# Altium PCB PCB.PcbDoc (part 2 of 2)
Units mm, origin at the board's own origin, x right, y up, seen from the top; angles counter-clockwise.
Board outline 81.5 x 81.5 mm, 2 copper layers (Top Layer, Bottom Layer), stack 1.571 mm thick; 125 components, 80 nets, 407 pads, 356 vias.
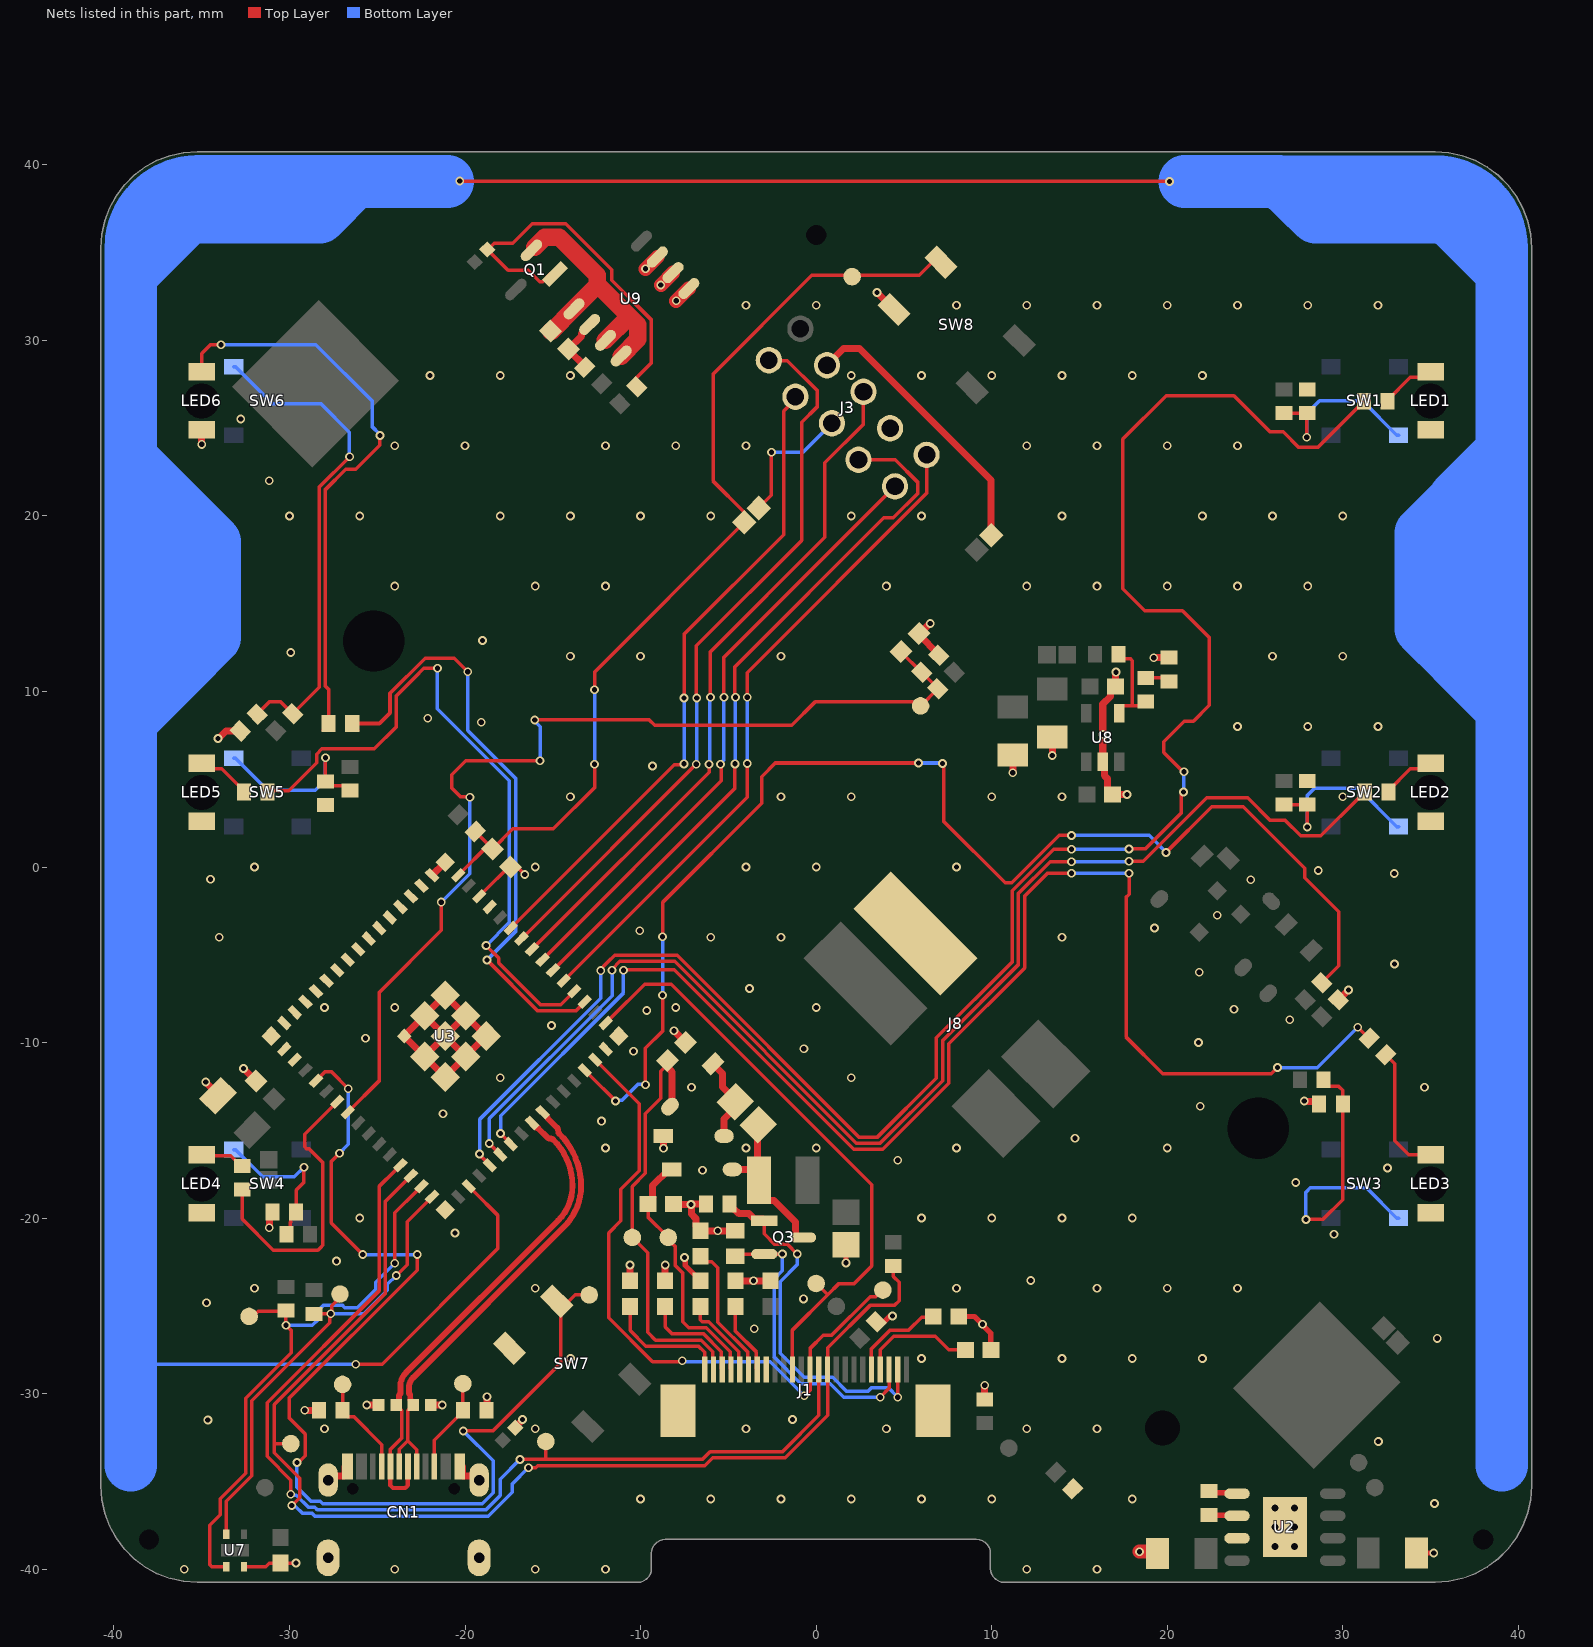
[diagram p2: the nets of this part, all layers, seen from the top]

## Via types
v1: diameter 0.5, hole 0.3, Top Layer to Bottom Layer, tented both sides, 350 vias
v2: diameter 0.6, hole 0.4, Top Layer to Bottom Layer, tented both sides, 6 vias

## Nets (pads, with @x,y where several pads share a name; then routed paths per layer and width w, separated by ;. In a path a pad name is that pad's centre, name@x,y a point inside that pad or via, vN(x,y) a via of type N, cw(c..) or ccw(c..) an arc to the next point about the centre after c; other vN are vias at no path point) (continued)
DISP_CS: J1.12 TP13.1 U3.29 | length 37.2
  Top Layer w0.2: U3.29@-12.298,-11.255 -10.075,-13.478 -10.075,-17.305 -11.124,-18.354 -11.124,-20.149 -11.825,-20.85 -11.825,-25.67 -9.32,-28.175 -7.675,-28.175 v1(-7.625,-28.125) ; v1(-0.675,-30.125) -0.35,-29.8 J1.12@-0.35,-28.619 -0.35,-27.425 0.4,-26.675 0.875,-26.675 3.075,-24.475 3.4,-24.475 TP13.1@3.625,-24.25
  Bottom Layer w0.2: v1(-7.625,-28.125) -7.575,-28.175 -2.625,-28.175 v1(-0.675,-30.125)
DISP_D/C: J1.11 TP16.1 U3.12 | length 58.9
  Top Layer w0.2: v1(-29.925,-35.725) -29.925,-34.925 -31.275,-33.575 -31.275,-30.525 -24.9,-24.15 -24.9,-18.2 U3.12@-23.965,-17.265 ; v1(-16.875,-33.75) -16.85,-33.725 -15.425,-33.725 ; TP16.1@-15.4,-32.725 -15.4,-33.7 -15.425,-33.725 ; J1.11@0.15,-28.619 0.15,-31.235 -1.915,-33.3 -6.045,-33.3 -6.47,-33.725 -15.425,-33.725
  Bottom Layer w0.2: v1(-29.925,-35.725) -29.868,-35.782 -29.613,-35.782 -28.921,-36.475 -28.553,-36.475 -28.403,-36.625 -18.825,-36.625 -18,-35.8 -18,-34.875 v1(-16.875,-33.75)
DISP_GDR: J1.2 Q3.1 R19.2 | length 21.3
  Top Layer w0.2: Q3.1@-2.95,-20.15 -2.95,-20.9 -2.35,-21.5 -1.625,-21.5 v1(-1.075,-22.05) ; v1(4.65,-30.2) J1.2@4.65,-28.619
  Top Layer w0.4: R19.2@-4.925,-19.2 -4.925,-19.275 -4.725,-19.475 -4.675,-19.475 -4.4,-19.75 -3.817,-19.75 -3.503,-20.064 -3.037,-20.064 Q3.1@-2.95,-20.15 -3.114,-20.15 Q3.1@-3.2,-20.236
  Bottom Layer w0.2: v1(-1.075,-22.05) -1.075,-22.645 -2.05,-23.62 -2.05,-27.7 -0.675,-29.075 0.945,-29.075 1.72,-29.85 2.975,-29.85 3.175,-29.65 4.1,-29.65 v1(4.65,-30.2)
DISP_PREVGH: C10.1 D3.1 J1.21 TP12.1 | length 15.1
  Top Layer w0.2: C10.1@-9.198,-18.844 -9.554,-19.2 -9.568,-19.2 C10.1@-9.577,-19.2 -9.577,-19.948 TP12.1@-8.425,-21.1 -8.425,-21.217 -8.025,-21.617 -8.025,-22.7 -7.6,-23.125 -7.6,-25.9 -7.25,-26.25 -6.265,-26.25 -4.9,-27.615 -4.9,-28.569 J1.21@-4.85,-28.619 ; D3.1@-8.393,-17.225 D3.1@-8.23,-17.225
  Top Layer w0.4: C10.1@-9.568,-19.2 -9.312,-18.944 -9.312,-18.144 D3.1@-8.393,-17.225
DISP_PREVGL: C12.1 D1.2 J1.23 TP11.1 | length 24.7
  Top Layer w0.2: C12.1@-8.464,-11.014 -8.464,-11.245 -8.48,-11.261 -8.85,-11.631 -8.85,-13.175 -9.725,-14.05 -9.725,-17.45 -10.475,-18.2 TP11.1@-10.475,-21.1 -9.6,-21.975 -9.6,-26.5 -9.15,-26.95 -6.555,-26.95 -5.9,-27.605 -5.9,-28.569 J1.23@-5.85,-28.619
  Top Layer w0.4: C12.1@-8.464,-11.014 -8.48,-11.03 -8.48,-11.261 -8.48,-11.392 -8.208,-11.665 -8.208,-13.533 D1.2@-8.323,-13.648
DISP_RESE: J1.3 Q3.2 R3.1 | length 17.6
  Top Layer w0.2: R3.1@-4.6,-22.175 -4.475,-22.05 Q3.2@-2.95,-22.05 ; Q3.2@-2.9,-22.1 Q3.2@-2.95,-22.05 ; v1(-1.925,-22.05) Q3.2@-2.95,-22.05 ; v1(3.65,-30.2) 4.15,-29.7 J1.3@4.15,-28.619
  Bottom Layer w0.2: v1(-1.925,-22.05) -1.925,-23 -2.4,-23.475 -2.4,-27.905 -0.88,-29.425 0.8,-29.425 1.575,-30.2 v1(3.65,-30.2)
DISP_RST: J1.10 R20.2 TP18.1 U3.13 | length 68
  Top Layer w0.2: v1@-29.932,-36.318 v1(-29.875,-36.375) -29.868,-36.375 -29.425,-35.932 -29.425,-34.82 -30.875,-33.37 -30.875,-32.825 ; TP18.1@-29.925,-32.85 -30.85,-32.85 -30.875,-32.825 ; U3.13@-23.364,-17.866 -24.55,-19.052 -24.55,-24.295 -30.875,-30.62 -30.875,-32.825 ; v1(-16.391,-34.225) -15.975,-34.225 -15.85,-34.1 -6.35,-34.1 -5.9,-33.65 -1.77,-33.65 0.65,-31.23 J1.10@0.65,-28.619 0.65,-27.395 3.07,-24.975 4.45,-24.975 4.725,-24.7 4.725,-23.65 4.4,-23.325 R20.2@4.4,-22.725
  Bottom Layer w0.2: v1(-29.875,-36.375) -29.818,-36.432 -29.645,-36.432 -29.253,-36.825 -28.698,-36.825 -28.548,-36.975 -18.68,-36.975 -17.311,-35.606 -17.311,-35.146 v1(-16.391,-34.225)
DISP_SDI: J1.14 TP15.1 U3.31 | length 34.2
  Top Layer w0.2: U3.31@-11.697,-8.603 -9.769,-6.675 -8.25,-6.675 3.175,-18.1 3.175,-22.725 2.175,-23.725 1.3,-23.725 0.663,-24.363 ; J1.14@-1.35,-28.619 -1.35,-26.375 0.663,-24.363 ; TP15.1@0,-23.725 0.025,-23.725 0.663,-24.363
ESP_DBG_RX: J3.7 U3.40 | length 36.9
  Top Layer w0.2: U3.40@-17.106,-3.194 -8.087,5.825 -7.575,5.825 v1(-7.525,5.875) v1@-7.475,5.875 ; v1(-7.525,9.625) -7.525,13.25 -1.85,18.925 -1.85,25.974 -1.179,26.645 J3.7@-1.179,26.788
  Bottom Layer w0.2: v1(-7.525,5.875) v1(-7.525,9.625)
ESP_DBG_TX: J3.6 U3.39 | length 41.3
  Top Layer w0.2: U3.39@-16.505,-3.795 -16.488,-3.795 -6.843,5.85 v1(-6.825,5.85) ; v1(-6.8,9.625) -6.825,9.65 -6.825,12.6 -0.825,18.6 -0.825,25.325 0.05,26.2 0.05,27.15 -1.642,28.842 -2.667,28.842 J3.6@-2.692,28.867
  Bottom Layer w0.2: v1(-6.825,5.85) -6.812,5.863 -6.812,9.613 v1(-6.8,9.625)
ESP_EN: C16.1 J7.1 R21.1 SW8.2 TP3.1 U3.45 | length 54.3
  Top Layer w0.2: U3.45@-20.111,-0.189 -18.895,1.028 C16.1@-18.428,1.028 ; R21.1@-19.423,2.023 C16.1@-18.428,1.028 ; v1(-12.625,5.85) -12.625,4.525 -14.975,2.175 -17.281,2.175 C16.1@-18.428,1.028 ; v1(-12.625,10.1) -12.625,11.1 J7.1@-4.088,19.637 -4.088,20.203 -5.875,21.989 -5.875,28.075 -0.25,33.7 5.875,33.7 6.621,34.446 SW8.2@7.116,34.446
  Bottom Layer w0.2: v1(-12.625,5.85) v1(-12.625,10.1)
ESP_IO0: SW7.2 TP19.1 U3.4 | length 61.9
  Top Layer w0.2: v1(-29.575,-33.925) -29.494,-33.925 -29.1,-33.531 -29.1,-32.3 -30.025,-31.375 -30.025,-30.265 -22.725,-22.965 v1(-22.725,-22.075) ; U3.4@-28.491,-12.174 -27.967,-11.65 -27.625,-11.65 v1(-26.65,-12.625) ; v1(-27.15,-16.3) -27.625,-16.775 -27.625,-20.275 v1(-25.825,-22.075) ; v1(-20.1,-32.125) -18.425,-32.125 -14.536,-28.236 -14.536,-24.977 SW7.2@-14.714,-24.799 ; SW7.2@-14.784,-24.729 SW7.2@-14.714,-24.799 ; TP19.1@-12.925,-24.375 -13.725,-24.375 -14.149,-24.799 SW7.2@-14.714,-24.799
  Bottom Layer w0.2: v1(-29.575,-33.925) -29.575,-35.326 -28.776,-36.125 -28.25,-36.125 -28.1,-36.275 -19.024,-36.275 -18.4,-35.651 -18.4,-33.825 v1(-20.1,-32.125) ; v1(-27.15,-16.3) -26.65,-15.8 v1(-26.65,-12.625) ; v1(-25.825,-22.075) v1(-22.725,-22.075)
ESP_SCL: R17.1 TP9.1 U3.15 U7.2 | length 27.1
  Top Layer w0.2: U7.2@-33.6,-38 -33.6,-36.125 -32.15,-34.675 -32.15,-30.41 -27.707,-25.967 -27.707,-25.507 v1(-27.65,-25.45) R17.1@-28.6,-25.45 ; v1(-27.65,-25.45) -27.593,-25.393 -27.593,-24.989 -27.125,-24.521 TP9.1@-27.125,-24.325 ; v1(-23.925,-23.275) -23.3,-22.65 -23.3,-20.206 U3.15@-22.162,-19.068
  Bottom Layer w0.2: v1(-27.65,-25.45) -25.775,-25.45 -24.424,-24.099 -24.424,-23.774 v1(-23.925,-23.275)
ESP_SDA: R18.1 TP10.1 U3.14 U7.3 | length 32.7
  Top Layer w0.2: U7.3@-33.6,-39.85 -34.433,-39.85 -34.55,-39.733 -34.55,-37.5 -33.95,-36.9 -33.95,-35.98 -32.5,-34.53 -32.5,-30.265 -29.9,-27.665 -29.9,-26.4 v1(-30.2,-26.1) R18.1@-30.2,-25.5 ; TP10.1@-32.3,-25.6 -32.084,-25.6 -31.784,-25.3 -30.4,-25.3 R18.1@-30.2,-25.5 ; R18.1@-30.2,-25.275 R18.1@-30.2,-25.5 ; v1(-24,-22.575) -24,-19.704 U3.14@-22.763,-18.467
  Bottom Layer w0.2: v1(-30.2,-26.1) -28.7,-26.1 -28.375,-25.775 -28.375,-25.275 -28.05,-24.95 -27,-24.95 -26.85,-25.1 -26.132,-25.1 -25.082,-24.05 -25.082,-23.657 v1(-24,-22.575)
ESP_TCK: J3.1 U3.35 | length 38.1
  Top Layer w0.2: -14.101,-6.199 -3.925,3.977 v1(-3.925,5.9) ; v1(-3.925,9.675) -3.925,11.075 6.288,21.288 J3.1@6.288,23.479
  Bottom Layer w0.2: v1(-3.925,5.9) v1(-3.925,9.675)
ESP_TDI: J3.10 U3.37 | length 34.9
  Top Layer w0.2: U3.37@-15.303,-4.997 -5.4,4.906 -5.4,5.8 v1(-5.45,5.85) ; v1(-5.25,9.675) -5.25,11.941 J3.10@4.492,21.683
  Bottom Layer w0.2: v1(-5.45,5.85) -5.45,5.917 -5.25,6.117 v1(-5.25,9.675)
ESP_TDO: J3.9 U3.36 | length 40.2
  Top Layer w0.2: U3.36@-14.702,-5.598 -4.625,4.479 v1(-4.625,5.875) ; v1(-4.6,9.675) -4.625,9.7 -4.625,11.4 3.86,19.885 4.39,19.885 5.775,21.27 5.775,21.933 4.512,23.196 J3.9@2.413,23.196
  Bottom Layer w0.2: v1(-4.625,5.875) -4.613,5.887 -4.613,9.663 v1(-4.6,9.675)
ESP_TMS: J3.3 U3.38 | length 39.2
  Top Layer w0.2: U3.38@-15.904,-4.396 -6.1,5.408 v1(-6.1,5.85) ; v1(-6.025,9.675) -6.025,12.25 0.5,18.775 0.5,23.025 2.696,25.221 J3.3@2.696,27.071
  Bottom Layer w0.2: v1(-6.1,5.85) -6.062,5.888 -6.062,9.638 v1(-6.025,9.675)
GND: C2.2 C3.2 C4.2 C5.2 C6.2 C7.2 C8.2 C9.2 C10.2 C11.2 C12.2 C13.2 C14.2 C15.2 C16.2 C17.2 C18.2 C19.2 C26.2 C27.2 C28.2 C29.2 CN1.A1 CN1.A12 CN1.B1 CN1.B12 CN1.SHELL1 CN1.SHELL2 CN1.SHELL3 CN1.SHELL4 D2.1 D4.1 D5.1 D6.1 J1.17 J1.MP1 J1.MP2 J3.2 J8.1 LED1.2 LED2.2 LED3.2 LED4.2 LED5.2 LED6.2 R1.1 R2.1 R3.2 R4.1 R5.1 R8.1 R10.1 R12.1 R13.1 R14.1 R19.1 R34.1 R35.1 R36.1 R37.1 R38.1 R39.1 SW7.4 SW8.4 U2.1 U2.3 U2.9 U3.1 U3.2 U3.30 U3.42 U3.43 U3.46 U3.47 U3.48 U3.49 U3.50 U3.51 U3.52 U3.53 U3.54 U3.55 U3.56 U3.57 U3.58 U3.59 U3.60 U3.61 U3.61_1 U3.61_2 U3.61_3 U3.61_4 U3.61_5 U3.61_6 U3.61_7 U3.61_8 U3.62 U3.63 U3.64 U3.65 U7.4 U8.2 U9.1 U9.2 U9.3 | length 81.6
  Top Layer w0.2: U7.4@-32.6,-39.85 -31.35,-39.85 -31.152,-39.652 C27.2@-30.5,-39.652 v1(-29.627,-39.652) v1@-29.625,-39.65 ; U3.43@-18.909,-1.391 -17.519,0 C16.2@-17.4,0 -17.025,0 v1(-16.6,-0.425)
  Top Layer w0.3: v1(-7.5,-22.25) -7.462,-22.288 -7.462,-22.688 -6.6,-23.55 C9.2@-6.6,-23.573 ; v1(1.7,-22.55) C2.2@1.7,-21.526 ; R4.1@3.427,-25.898 3.48,-25.951 3.834,-25.951 4.21,-25.575 v1(4.35,-25.575) ; C5.2@8.127,-25.6 9.025,-25.6 v1(9.475,-26.05) 9.475,-26.086 9.952,-26.563 C4.2@9.952,-27.5 ; R5.1@22.375,-35.55 22.463,-35.638 23.918,-35.638 U2.1@23.975,-35.695 ; C15.2@34.201,-39.075 v1(35.175,-39.075)
  Top Layer w0.4: v1(-35,24.075) LED6.2@-35,24.9 ; v1(-34.775,-12.25) -34.073,-12.952 C17.2@-34.073,-13.027 ; v1(-34.075,7.325) -34.048,7.325 -33.625,7.748 -33.191,7.748 -33.138,7.801 -32.855,7.801 R39.1@-32.802,7.748 ; v1(-32.625,-11.475) C18.2@-31.914,-12.186 ; v1(-31.15,-20.55) -31.131,-20.531 -31.131,-19.806 R37.1@-30.975,-19.65 ; v1(-29.125,-30.95) R2.1@-28.325,-30.95 ; CN1.SHELL1@-27.8,-34.92 -27.58,-34.7 -26.89,-34.7 -26.85,-34.66 CN1.A1@-26.85,-34.15 ; v1@-25.625,-30.675 v1(-25.6,-30.65) D4.1@-24.929,-30.65 ; D5.1@-21.946,-30.65 v1(-21.3,-30.65) ; U3.46@-21.879,-0.471 -21.207,0.2 U3.65@-21.066,0.2 ; CN1.A12@-20.15,-34.15 -20.15,-34.66 -20.11,-34.7 -19.42,-34.7 CN1.SHELL2@-19.2,-34.92 ; R1.1@-18.775,-30.95 -18.762,-30.937 -18.762,-30.187 v1(-18.75,-30.175) ; D6.1@-17.144,-31.944 -17.144,-31.919 -16.725,-31.5 v1(-16.725,-31.475) ; C13.2@-10.6,-23.573 v1(-10.6,-22.675) ; D2.1@-8.705,-15.325 -8.7,-15.33 v1(-8.7,-16.025) ; C11.2@-8.6,-23.573 v1(-8.6,-22.675) ; C10.2@-8.123,-19.2 -8.111,-19.212 -7.138,-19.212 v1(-7.125,-19.225) ; v1(-8.097,-9.325) C12.2@-7.436,-9.986 ; R19.1@-6.275,-19.2 -7.1,-19.2 v1(-7.125,-19.225) ; C7.2@-4.6,-23.573 v1(-3.573,-23.573) C6.2@-2.6,-23.573 ; R3.2@-4.6,-20.725 v1(-5.6,-20.725) v1(-5.6,-20.725) C8.2@-6.6,-20.723 -6.856,-20.467 -6.856,-20.019 -7.106,-19.769 -7.106,-19.244 v1(-7.125,-19.225) ; v1(3.463,32.725) SW8.4@4.429,31.759 ; v1(6.5,13.875) 6.473,13.875 5.898,13.3 C26.2@5.85,13.3 5.85,13.237 6.975,12.112 R14.1@6.975,12.05 ; R12.1@9.6,-30.325 v1(9.6,-29.525) ; v1(11.2,5.375) C19.2@11.2,6.374 ; C29.2@13.45,7.399 v1(13.45,6.35) v1@13.475,6.325 ; v1(17.076,11.101) 17.063,11.088 17.063,10.288 C28.2@17.05,10.275 17.027,10.275 16.771,10.019 16.771,9.721 16.325,9.275 v1(16.325,7.55) U8.2@16.325,6 16.425,5.9 16.425,5.2 16.598,5.027 16.598,4.381 16.854,4.125 C3.2@16.877,4.125 v1(17.7,4.125) ; v1(19.225,11.925) R8.1@20.1,11.925 ; v1(27.8,-13.325) 27.819,-13.344 28.494,-13.344 R36.1@28.65,-13.5 ; R10.1@29.752,-7.573 v1(30.325,-7) ; U3.61_1@-22.303,-10.795 U3.61_2@-21.137,-11.962 U3.61_3@-19.97,-10.795 ; U3.61_1@-22.303,-10.795 U3.61_8@-23.47,-9.628 U3.61_7@-22.303,-8.462 ; U3.61_1@-22.303,-10.795 U3.61@-21.137,-9.628 ; U3.61_7@-22.303,-8.462 U3.61@-21.137,-9.628 ; U3.61_7@-22.303,-8.462 U3.61_6@-21.137,-7.295 U3.61_5@-19.97,-8.462 ; U3.61@-21.137,-9.628 U3.61_3@-19.97,-10.795 ; U3.61@-21.137,-9.628 U3.61_5@-19.97,-8.462 ; U3.61_3@-19.97,-10.795 U3.61_4@-18.803,-9.628 U3.61_5@-19.97,-8.462
  Top Layer w0.8: v1(-9.725,34.075) U9.3@-9.046,34.754 ; v1(-8.85,33.15) -8.148,33.852 U9.2@-8.148,33.856 ; v1(-7.975,32.25) -7.267,32.958 U9.1@-7.25,32.958 ; v1(18.425,-39) 19.347,-39 C14.2@19.447,-39.1
  other v1: -36,-40 -24,-40 -16,-40 -12,-40 12,-40 16,-40 35.225,-36.25 -10,-36 -6,-36 -2,-36 2,-36 6,-36 10,-36 18,-36 32.025,-32.725 -28,-32 -16,-32 -4,-32 4,-32 12,-32 16,-32 -34.65,-31.5 -1.35,-31.475 -14,-28 6,-28 14,-28 18,-28 22,-28 35.375,-26.85 -3.525,-26.3 -34.725,-24.825 -0.725,-24.6 -32,-24 -16,-24 8,-24 16,-24 20,-24 24,-24 12.225,-23.55 -27.325,-22.45 29.5,-20.925 -20.575,-20.85 -26,-20 6,-20 10,-20 14,-20 18,-20 27.325,-17.975 -6.475,-17.275 32.55,-17.15 4.65,-16.7 -12,-16 -4,-16 0,-16 8,-16 20,-16 14.75,-15.45 -12.225,-14.475 -21.25,-14.05 21.875,-13.625 -7.1,-12.55 34.65,-12.55 -18,-12 2,-12 -10.4,-10.5 -0.7,-10.35 21.775,-10 -25.675,-9.75 -15.075,-9.025 26.975,-8.7 -9.65,-8.175 23.8,-8.1 -28,-8 -24,-8 -8,-8 0,-8 -3.8,-6.925 21.825,-6 32.95,-5.525 -34,-4 -6,-4 -2,-4 14,-4 -10.05,-3.625 19.275,-3.475 22.85,-2.75 24.75,-0.725 -34.5,-0.7 32.925,-0.375 28.6,-0.2 -32,0 -16,0 -4,0 0,0 8,0 -14,4 -2,4 2,4 10,4 14,4 30,4 -9.325,5.75 24,8 28,8 32,8 -19.075,8.25 -22.125,8.475 -14,12 -10,12 -2,12 26,12 30,12 -29.926,12.226 -19,12.9 -24,16 -16,16 -12,16 4,16 12,16 16,16 20,16 24,16 28,16 -30,20 -26,20 -18,20 -14,20 -10,20 -6,20 2,20 6,20 14,20 22,20 26,20 30,20 -31.15,22 -24,24 -20,24 -12,24 -8,24 -4,24 12,24 16,24 20,24 24,24 -32.775,25.525 -22,28 -18,28 -14,28 2,28 6,28 10,28 14,28 18,28 22,28 -4,32 0,32 8,32 12,32 16,32 20,32 24,32 28,32 32,32
  other v2: 26.15,-38.7 27.25,-38.7 26.15,-37.6 27.25,-37.6 26.15,-36.5 27.25,-36.5
LED_1: R23.1 U3.19 | length 107
  Top Layer w0.2: v1(-19.175,-16.35) -19.175,-16.399 U3.19@-18.591,-16.982 ; v1(-12.274,-5.902) -12.274,-5.821 -12.125,-5.671 -12.125,-5.668 -11.832,-5.375 -11.829,-5.375 -11.479,-5.025 -7.92,-5.025 2.435,-15.38 3.495,-15.38 6.851,-12.024 6.851,-9.736 11.175,-5.411 11.175,-1.36 13.542,1.007 v1(14.543,1.007) ; v1(17.821,1.029) 18.754,1.029 20.808,3.083 20.808,4.076 20.925,4.194 v1(20.925,4.275) ; v1(20.95,5.425) 20.9,5.425 19.8,6.525 19.8,7.132 20.968,8.3 21.492,8.3 22.4,9.208 22.4,13.075 20.975,14.5 20.965,14.5 20.865,14.6 18.718,14.6 17.475,15.843 17.475,24.38 19.945,26.85 23.8,26.85 25.85,24.8 26.6,24.8 27.5,23.9 28.575,23.9 30.825,26.15 30.9,26.15 31.2,26.45 R23.1@31.2,26.525
  Bottom Layer w0.2: v1(-19.175,-16.35) -19.175,-14.385 -12.274,-7.484 v1(-12.274,-5.902) ; v1(14.543,1.007) 14.554,1.018 17.811,1.018 v1(17.821,1.029) ; v1(20.925,4.275) 20.937,4.287 20.937,5.413 v1(20.95,5.425)
LED_2: R25.1 U3.20 | length 74.9
  Top Layer w0.2: v1(-18.621,-15.75) U3.20@-17.99,-16.381 ; v1(-11.625,-5.875) -11.625,-5.818 -11.182,-5.375 -8.065,-5.375 2.29,-15.73 3.64,-15.73 7.201,-12.169 7.201,-9.881 11.525,-5.556 11.525,-1.505 13.33,0.3 v1(14.55,0.3) ; v1(17.825,0.325) 18.625,0.325 22.25,3.95 24.575,3.95 25.875,2.65 26.725,2.65 27.6,1.775 28.75,1.775 30.875,3.9 30.95,3.9 31.25,4.2 R25.1@31.25,4.275
  Bottom Layer w0.2: v1(-18.621,-15.75) -18.621,-14.326 -11.625,-7.33 v1(-11.625,-5.875) ; v1(14.55,0.3) 14.563,0.312 17.812,0.312 v1(17.825,0.325)
LED_3: R27.1 U3.21 | length 82.1
  Top Layer w0.2: v1(-17.975,-15.175) -17.975,-15.194 U3.21@-17.185,-15.985 ; v1(-10.975,-5.875) -10.95,-5.85 -8.085,-5.85 2.145,-16.08 3.785,-16.08 7.551,-12.314 7.551,-10.074 11.875,-5.75 11.875,-1.65 13.175,-0.35 v1(14.55,-0.35) ; v1(17.825,-0.35) 17.825,-1.55 17.65,-1.725 17.65,-9.68 19.745,-11.775 25.925,-11.775 v1(26.275,-11.425) ; v1(30.85,-9.125) 31.473,-9.748 R27.1@31.498,-9.748
  Bottom Layer w0.2: v1(-17.975,-15.175) -17.975,-14.175 -10.975,-7.175 v1(-10.975,-5.875) ; v1(14.55,-0.35) v1(17.825,-0.35) ; v1(26.275,-11.425) 28.55,-11.425 v1(30.85,-9.125)
LED_4: R29.1 U3.6 | length 16.2
  Top Layer w0.2: R29.1@-32.7,-18.375 -32.7,-20.05 -30.925,-21.825 -28.379,-21.825 -28.229,-21.675 -28.225,-21.675 -28.1,-21.55 -28.1,-16.83 -28.868,-16.063 -29.008,-16.063 -29.125,-15.945 -29.125,-15.213 U3.6@-27.571,-13.659
LED_5: R31.1 U3.34 | length 38.9
  Top Layer w0.2: R31.1@-31.25,4.275 -31.175,4.35 -30.05,4.35 -28.451,5.949 -28.451,6.432 -28.155,6.729 -25.171,6.729 -23.925,7.975 -23.925,9.743 -22.843,10.825 -22.343,11.325 v1(-21.575,11.325) ; v1(-18.8,-4.475) -18.09,-5.185 -18.09,-5.465 -15.705,-7.85 -14.55,-7.85 U3.34@-13.783,-7.083
  Bottom Layer w0.2: v1(-21.575,11.325) -21.575,9.007 -17.475,4.907 -17.475,-3.15 v1(-18.8,-4.475)
LED_6: R33.1 U3.33 | length 34.8
  Top Layer w0.2: R33.1@-26.125,7.8 -26.425,8.1 R33.1@-26.425,8.175 -24.875,8.175 -24.275,8.775 -24.275,9.888 -22.263,11.9 -20.625,11.9 v1(-19.85,11.125) ; v1(-18.75,-5.3) -15.85,-8.2 -13.698,-8.2 U3.33@-13.182,-7.684
  Bottom Layer w0.2: v1(-19.85,11.125) -19.85,7.777 -17.125,5.052 -17.125,-3.675 v1(-18.75,-5.3)
NetC1_1: C1.1 D1.1 D2.2 | length 4.9
  Top Layer w0.4: D1.1@-5.877,-11.202 -5.325,-11.753 -5.325,-12.525 -4.605,-13.245 C1.1@-4.605,-13.37 -4.605,-13.707 -5.245,-14.348 D2.2@-5.245,-15.325
NetC1_2: C1.2 D3.2 L1.2 Q3.3 | length 9.6
  Top Layer w0.2: L1.2@-3.828,-17.225 L1.2@-3.331,-17.722
  Top Layer w0.4: D3.2@-4.77,-17.225 L1.2@-3.828,-17.225 ; C1.2@-3.295,-14.68 -3.331,-14.716 -3.331,-17.722 -3.331,-17.769 L1.2@-3.251,-17.85 -3.251,-18.526 -2.773,-19.003 -2.397,-19.003 -1.186,-20.214 -1.186,-21.02 -1.107,-21.1 Q3.3@-0.75,-21.1
NetC4_1: C4.1 J1.4 | length 6.6
  Top Layer w0.2: J1.4@3.65,-28.619 3.65,-27.5 4.425,-26.725 6.775,-26.725 7.55,-27.5 C4.1@8.498,-27.5
NetC5_1: C5.1 J1.5 | length 5.5
  Top Layer w0.2: J1.5@3.15,-28.619 3.15,-27.45 4.225,-26.375 5.275,-26.375 6.011,-25.639 6.634,-25.639 C5.1@6.673,-25.6
NetC7_1: C7.1 J1.18 | length 4.1
  Top Layer w0.2: C7.1@-4.6,-25.027 -4.6,-26.43 -3.4,-27.63 -3.4,-28.569 J1.18@-3.35,-28.619
NetC8_1: C8.1 J1.19 | length 7.8
  Top Layer w0.2: C8.1@-6.6,-22.177 -6.294,-22.483 -5.942,-22.483 -5.6,-22.825 -5.6,-25.925 -3.9,-27.625 -3.9,-28.569 J1.19@-3.85,-28.619
NetC9_1: C9.1 J1.20 | length 4.7
  Top Layer w0.2: C9.1@-6.6,-25.027 -6.6,-25.783 -6.483,-25.9 -6.12,-25.9 -4.4,-27.62 -4.4,-28.569 J1.20@-4.35,-28.619
NetC11_1: C11.1 J1.22 | length 6
  Top Layer w0.2: C11.1@-8.6,-25.027 -8.6,-26.2 -8.2,-26.6 -6.41,-26.6 -5.4,-27.61 -5.4,-28.569 J1.22@-5.35,-28.619
NetC13_1: C13.1 J1.24 | length 7.1
  Top Layer w0.2: C13.1@-10.6,-25.027 -10.6,-26.4 -9.7,-27.3 -6.7,-27.3 -6.35,-27.65 J1.24@-6.35,-28.619
NetC30_1: C30.1 R40.1 U9.6 | length 3.3
  Top Layer w0.4: R40.1@-13.177,28.477 -13.177,28.527 -14.1,29.45 C30.1@-14.1,29.5 -13.353,30.247 -13.353,30.393 -12.9,30.846 U9.6@-12.9,30.9
NetC30_2: C30.2 Q1.2 U9.5 U9.7 U9.8 | length 16.4
  Top Layer w1: Q1.2@-16.04,35.304 -15.461,35.883 -14.633,35.883 -12.462,33.713 -12.462,33.188 ; C30.2@-15.128,30.528 -15.068,30.528 U9.5@-13.798,31.798 -12.462,33.134 -12.462,33.188 ; U9.7@-12.002,30.002 -10.716,31.288 -10.563,31.288 ; U9.8@-11.104,29.104 -10.156,30.052 -10.156,30.881 -10.563,31.288 ; -12.462,33.188 -10.563,31.288
NetD7_2: D7.2 Q1.1 R9.1 | length 21.5
  Top Layer w0.2: Q1.1@-14.875,33.781 -15.138,33.781 -15.577,33.343 -15.742,33.343 -16.4,34 -17.55,34 D7.2@-18.725,35.175 -18.696,35.175 -18.346,35.525 -17.275,35.525 -16.167,36.633 -14.258,36.633 -11.64,34.015 -11.64,33.426 -9.406,31.191 -9.406,28.7 -10.276,27.83 -10.276,27.405 R9.1@-10.223,27.352
NetJ3_4: J3.4 J6.2 | length 16
  Top Layer w0.4: J3.4@0.617,28.584 1.558,29.525 2.475,29.525 9.963,22.037 J6.2@9.963,18.888
NetJ3_8: J3.8 J7.2 | length 7.6
  Top Layer w0.2: J7.2@-3.275,20.45 -2.55,21.175 v1(-2.55,23.625)
  Bottom Layer w0.2: v1(-2.55,23.625) -0.75,23.625 J3.8@0.9,25.275
NetLED1_1: LED1.1 R23.2 | length 3.2
  Top Layer w0.2: R23.2@32.55,26.525 32.55,26.6 33.85,27.9 34.75,27.9 LED1.1@35,28.15
NetLED2_1: LED2.1 R25.2 | length 3.1
  Top Layer w0.2: R25.2@32.6,4.275 32.6,4.35 33.85,5.6 34.75,5.6 LED2.1@35,5.85
NetLED3_1: LED3.1 R27.2 | length 7.6
  Top Layer w0.2: R27.2@32.452,-10.702 32.95,-11.2 32.95,-15.6 33.75,-16.4 LED3.1@35,-16.4 35,-16.325 LED3.1@35.025,-16.3
NetLED4_1: LED4.1 R29.2 | length 2.5
  Top Layer w0.2: LED4.1@-35,-16.45 -33.35,-16.45 -32.775,-17.025 R29.2@-32.7,-17.025
NetLED5_1: LED5.1 R31.2 | length 3.1
  Top Layer w0.2: LED5.1@-35,5.85 -34.75,5.6 -33.85,5.6 -32.6,4.35 R31.2@-32.6,4.275
NetLED6_1: LED6.1 R33.2 | length 33.7
  Top Layer w0.2: LED6.1@-35,28.2 -35,29.25 -34.5,29.75 v1(-33.9,29.75) ; LED6.1@-34.85,28.15 -34.45,28.55 -34.4,28.55 LED6.1@-34.35,28.6 ; R33.2@-28.075,7.8 -27.775,8.1 R33.2@-27.775,8.175 -27.775,10.125 -27.95,10.3 -27.95,21.505 -26.805,22.65 -26.225,22.65 -24.85,24.025 v1(-24.85,24.575)
  Bottom Layer w0.2: v1(-33.9,29.75) -28.5,29.75 -25.3,26.55 -25.3,25.092 -24.85,24.642 v1(-24.85,24.575)
NetR5_2: R5.2 U2.2 | length 1.6
  Top Layer w0.3: R5.2@22.375,-36.9 22.407,-36.932 23.942,-36.932 U2.2@23.975,-36.965
NetR6_1: R6.1 R7.2 U8.4 | length 5.4
  Top Layer w0.2: R6.1@17.225,12.125 17.475,11.875 17.883,11.875 18,11.758 18,9.2 17.975,9.175 ; U8.4@17.275,8.75 17.275,8.975 17.475,9.175 18,9.175 18.525,9.175 R7.2@18.775,9.425
NetR7_1: R7.1 R8.2 | length 1.4
  Top Layer w0.2: R7.1@18.775,10.775 19.9,10.775 R8.2@20.1,10.575
NetR22_2: R22.2 R34.2 SW1.3 | length 10.4
  Top Layer w0.2: R22.2@26.65,25.85 27.925,25.85 R34.2@27.95,25.825 ; v1(27.95,24.475) R34.2@27.95,25.825 ; R34.2@27.975,25.85 R34.2@27.95,25.825
  Bottom Layer w0.2: v1(27.95,24.475) 27.95,25.825 28.675,26.55 31.125,26.55 33.075,24.6 SW1.3@33.175,24.6
NetR24_2: R24.2 R35.2 SW2.3 | length 10.7
  Top Layer w0.2: R24.2@26.65,3.55 R35.2@27.975,3.55 v1(27.975,2.275)
  Bottom Layer w0.2: v1(27.975,2.275) 27.975,4.075 28.4,4.5 30.875,4.5 33.075,2.3 SW2.3@33.175,2.3
NetR26_2: R26.2 R36.2 SW3.3 | length 17.8
  Top Layer w0.2: v1(27.9,-20.075) 28.875,-20.075 30,-18.95 R36.2@30,-13.5 30,-12.725 29.775,-12.5 29.2,-12.5 28.9,-12.2 R26.2@28.9,-12.125
  Bottom Layer w0.2: v1(27.9,-20.075) 27.9,-18.525 28.15,-18.275 31.35,-18.275 33.075,-20 SW3.3@33.175,-20
NetR28_2: R28.2 R37.2 SW4.3 | length 9.1
  Top Layer w0.2: R28.2@-30.175,-20.925 -29.95,-20.7 -29.95,-20.25 -29.925,-20.225 -29.925,-19.95 R37.2@-29.625,-19.65 -29.625,-18.4 -29.175,-17.95 v1(-29.175,-17.1)
  Bottom Layer w0.2: SW4.3@-33.175,-16.1 -33.075,-16.1 -31.525,-17.65 -29.725,-17.65 v1(-29.175,-17.1)
NetR30_2: R30.2 R38.2 SW5.3 | length 10.5
  Top Layer w0.2: v1(-27.951,6.225) -27.951,4.876 R38.2@-27.95,4.875 -27.7,4.625 -27.175,4.625 -26.825,4.625 R30.2@-26.55,4.35
  Bottom Layer w0.2: SW5.3@-33.175,6.2 -33.075,6.2 -31.25,4.375 -28.525,4.375 -27.951,4.949 v1(-27.951,6.225)
NetR32_1: R32.1 R39.2 SW6.3 | length 28.1
  Top Layer w0.2: R39.2@-31.848,8.702 -31.15,9.4 -30.495,9.4 R32.1@-29.823,8.727 -28.3,10.25 -28.3,21.65 v1(-26.575,23.375)
  Bottom Layer w0.2: SW6.3@-33.175,28.5 -33.075,28.5 -30.95,26.375 -28.2,26.375 -26.6,24.775 -26.6,23.4 v1(-26.575,23.375)
PROXIMITY: U3.17 | length 354.9
  Top Layer w0.2: v1(-26.225,-28.325) -24.725,-28.325 -18.125,-21.725 -18.125,-19.853 U3.17@-19.51,-18.467 ; v1(-20.3,39.075) 20.1,39.075 v1(20.125,39.05)
  Bottom Layer w0.2: -39.05,-28.275 ccw(c-38.959,-28.184) -38.959,-28.312 -26.238,-28.312 v1(-26.225,-28.325) ; 21,39.05 22.52,39.05 22.523,39.05 26.35,39.05 36.353,39.05 36.626,38.778
  Bottom Layer w3: -39.05,-34.075 -39.05,-28.275 -39.05,8.275 ; -39.05,10.975 -39.05,23.325 ; -39.05,11.5 -39.05,8.275 ; -38.962,35.996 ccw(c-36.03,35.362) -39.022,35.58 -39.042,35.296 ccw(c-36.05,35.082) -39.05,35.082 -39.05,34.223 ; -38.962,35.996 -38.939,36.103 cw(c-36.006,35.472) -38.817,36.52 -38.777,36.626 cw(c-35.967,35.577) -38.6,37.015 ; -21,39.05 -26.25,39.05 ; 21,39.05 22.523,39.05 ; 22.52,39.05 cw(c22.52,36.05) 22.523,39.05 ; 26.35,39.05 26.352,39.048 ; 35.636,36.95 35.8,37.114 ; 35.636,37.015 28.45,37.015 26.352,39.048 ; 36.425,11.6 36.375,11.65 ; 36.425,21 36.375,20.95 ; 38.975,23.625 36.375,21.025 36.375,20.95 ; 39.05,-34.075 39.05,8.95 ; -39.05,8.275 -36.225,11.1 ; -39.05,23.325 -39.05,34.223 ; -39.05,23.325 -36.225,20.5 ; -39.05,34.223 -38.517,34.223 -35.725,37.015 ; -38.6,37.015 -38.546,37.114 cw(c-35.913,35.676) -38.315,37.474 -38.247,37.564 cw(c-35.846,35.766) -37.965,37.889 -37.886,37.968 cw(c-35.766,35.846) -37.564,38.247 -37.474,38.315 cw(c-35.676,35.913) -37.114,38.546 -37.015,38.6 cw(c-35.577,35.967) -36.626,38.778 -36.52,38.817 cw(c-35.472,36.006) -36.11,38.938 -36,38.961 cw(c-35.362,36.03) -35.576,39.022 -35.295,39.042 cw(c-35.082,36.05) -35.082,39.05 -26.25,39.05 ; -38.6,37.015 -35.725,37.015 ; -36.225,11.1 -36.225,20.5 ; -36.225,11.1 -34.25,13.075 -34.25,18.525 -36.225,20.5 ; -35.725,37.015 -28.285,37.015 -26.25,39.05 ; 22.523,39.05 24.625,39.049 26.352,39.048 ; 26.352,39.048 35.082,39.042 35.296,39.042 35.576,39.022 cw(c35.362,36.03) 35.996,38.962 36.11,38.938 cw(c35.472,36.006) 36.52,38.817 36.626,38.778 cw(c35.577,35.967) 37.015,38.6 37.114,38.546 cw(c35.676,35.913) 37.474,38.315 37.564,38.247 cw(c35.766,35.846) 37.887,37.967 37.967,37.887 cw(c35.846,35.766) 38.247,37.564 38.315,37.474 cw(c35.913,35.676) 38.546,37.114 ; 35.8,37.114 38.546,37.114 ; 35.8,37.114 39.05,33.864 ; 36.375,11.65 36.375,11.625 39.05,8.95 ; 36.375,11.65 34.45,13.575 34.45,19.025 36.375,20.95 ; 36.375,11.65 36.375,20.95 ; 38.546,37.114 38.6,37.015 cw(c35.967,35.577) 38.778,36.626 38.817,36.52 cw(c36.006,35.472) 38.938,36.11 38.961,36 cw(c36.03,35.362) 39.022,35.576 39.033,35.426 ccw(c42.026,35.636) 39.034,35.418 39.042,35.296 cw(c36.05,35.082) 39.05,35.082 39.05,33.864 ; 39.05,8.95 39.05,33.864
USB_CC1: CN1.A5 R2.2 TP1.1 | length 5.8
  Top Layer w0.2: TP1.1@-26.975,-29.475 R2.2@-26.975,-30.95 -26.975,-31.025 -26.675,-31.325 -26.325,-31.325 -24.75,-32.9 CN1.A5@-24.75,-34.15
USB_CC2: CN1.B5 R1.2 TP2.1 | length 5.4
  Top Layer w0.2: CN1.B5@-21.75,-34.15 -21.75,-32.65 -20.125,-31.025 R1.2@-20.125,-30.95 TP2.1@-20.125,-29.425
USB_N: CN1.A7 CN1.B7 D4.2 U3.23 | length 27.7
  Top Layer w0.2: CN1.B7@-24.25,-34.15 -24.25,-33.165 -23.613,-32.528 -23.613,-30.963 -23.921,-30.654 D4.2@-23.921,-30.65
  Top Layer w0.251: CN1.B7@-24.25,-34.15 -24.25,-35.228 -24.103,-35.375 -23.4,-35.375 -23.253,-35.228 -23.253,-34.153 CN1.A7@-23.25,-34.15
  Top Layer w0.335: D4.2@-23.921,-30.65 ccw(c-24.32,-30.251) -23.756,-30.251 -23.756,-30.127 cw(c-23.626,-30.127) -23.718,-30.035 ccw(c-23.81,-29.943) -23.68,-29.943 -23.68,-29.561 cw(c-22.628,-29.561) -23.372,-28.817 ; -23.372,-28.817 -14.696,-20.141 ccw(c-16.672,-18.165) -13.877,-18.165 ccw(c-17.582,-18.165) -14.962,-15.545 ccw(c-15.143,-15.726) -15.143,-15.47 cw(c-15.143,-15.214) -15.324,-15.395 -15.826,-14.893 ccw(c-15.904,-14.972) U3.23@-15.904,-14.861
USB_P: CN1.A6 CN1.B6 D5.2 U3.24 | length 26.4
  Top Layer w0.2: CN1.A6@-23.75,-34.15 -23.75,-33.16 -23.263,-32.672 -23.263,-30.963 -22.954,-30.654 D5.2@-22.954,-30.65 ; -23.264,-32.674 -22.75,-33.188 CN1.B6@-22.75,-34.15
  Top Layer w0.335: D5.2@-22.954,-30.65 cw(c-22.555,-30.251) -23.05,-30.521 cw(c-22.555,-30.251) -23.119,-30.251 -23.119,-30.127 ccw(c-23.249,-30.127) -23.157,-30.035 cw(c-23.065,-29.943) -23.195,-29.943 -23.195,-29.661 cw(c-22.386,-29.661) -22.958,-29.089 -14.35,-20.481 ccw(c-16.663,-18.168) -13.392,-18.168 -13.392,-18.16 ccw(c-17.57,-18.16) -14.619,-15.202 cw(c-14.438,-15.021) -14.694,-15.021 ccw(c-14.95,-15.021) -14.769,-14.84 -15.271,-14.338 cw(c-15.193,-14.26) U3.24@-15.303,-14.26
V_SPLY_DETECT: R11.2 U3.28 | length 72.3
  Top Layer w0.2: U3.28@-12.899,-11.856 -11.43,-13.325 v1(-11.425,-13.325) ; v1(-9.725,-12.4) -9.725,-10.325 -8.75,-9.35 v1(-8.75,-7.3) ; v1(-8.75,-3.975) -8.75,-2.025 -3.1,3.625 -3.1,5.15 -2.325,5.925 v1(5.825,5.925) ; v1(7.2,5.9) 7.257,5.843 7.257,2.604 10.761,-0.9 11.14,-0.9 13.84,1.8 v1(14.55,1.8) ; v1(19.925,0.825) 22.525,3.425 24.325,3.425 27.825,-0.075 27.825,-0.608 29.775,-2.558 29.775,-5.625 R11.2@28.802,-6.598
  Bottom Layer w0.2: v1(-11.425,-13.325) -11.397,-13.297 -11.075,-13.297 -10.14,-12.363 -9.762,-12.363 v1(-9.725,-12.4) ; v1(-8.75,-7.3) v1(-8.75,-3.975) ; v1(5.825,5.925) 7.175,5.925 v1(7.2,5.9) ; v1(14.55,1.8) 18.975,1.8 19.925,0.85 v1(19.925,0.825)
VBAT_ADC: C26.1 R14.2 R15.1 TP8.1 U3.7 | length 57.8
  Top Layer w0.2: U3.7@-26.688,-13.977 -24.875,-12.165 -24.875,-7.125 -21.35,-3.6 v1(-21.35,-2) ; v1(-19.725,3.975) -19.764,4.014 -20.264,4.014 -20.75,4.5 -20.75,5.25 -19.95,6.05 v1(-15.725,6.05) ; v1(-16.025,8.375) -9.5,8.375 -9.2,8.075 -1.39,8.075 -0.065,9.4 5.509,9.4 5.734,9.175 TP8.1@5.95,9.175 R15.1@6.923,10.148 6.923,10.193 R14.2@6.02,11.095 5.998,11.095 C26.1@4.822,12.272
  Bottom Layer w0.2: v1(-21.35,-2) -19.725,-0.375 v1(-19.725,3.975) ; v1(-16.025,8.375) -16.025,8.294 -15.725,7.994 v1(-15.725,6.05)
pads on no net: B1.H1 B1.H2 B1.H3 CN1.A8 CN1.B8 CN1.H1 CN1.H2 J1.1 J1.6 J1.7 J3.5 J8.MP1 J8.MP2 LED1.4 LED2.4 LED3.4 LED4.4 LED5.4 LED6.4 SW1.1 SW1.4 SW2.1 SW2.4 SW3.1 SW3.4 SW4.1 SW4.4 SW5.1 SW5.4 SW6.1 SW6.4 SW7.1 SW7.3 SW8.1 SW8.3 U3.22 U3.26 U3.27 U3.44 U7.5 U9.4
copper on no net: | length 6.1
  Top Layer w0.2: 9.548,35.076 10.173,35.976 10.573,35.501 11.296,36.623 ; 11.311,36.611 12.034,35.489 12.434,35.964 13.059,35.064
  other v1: -21.15,-5.2 -23.4,-3.9 23.375,2.5 -23.025,18.3 -33.475,31.875 -23.825,33.975

## Polygon pours and split planes (outlines as drawn)
GND on Top Layer "main top pour gnd" (solid, remove dead copper, pour order 2): -35.25,-40.75 -10.18,-40.75 -10.002,-40.73 -9.833,-40.671 -9.681,-40.575 -9.555,-40.449 -9.459,-40.297 -9.4,-40.128 -9.38,-39.95 -9.38,-39.1 -9.36,-38.922 -9.301,-38.753 -9.205,-38.601 -9.079,-38.475 -8.927,-38.379 -8.758,-38.32 -8.58,-38.3 9.13,-38.3 9.308,-38.32 9.477,-38.379 9.629,-38.475 9.755,-38.601 9.851,-38.753 9.91,-38.922 9.93,-39.1 9.93,-39.95 9.95,-40.128 10.009,-40.297 10.105,-40.449 10.231,-40.575 10.383,-40.671 10.552,-40.73 10.73,-40.75 35.25,-40.75 36.033,-40.694 36.8,-40.527 37.535,-40.253 38.224,-39.877 38.852,-39.407 39.407,-38.852 39.877,-38.224 40.253,-37.535 40.527,-36.8 40.694,-36.033 40.75,-35.25 40.75,35.25 40.694,36.033 40.527,36.8 40.253,37.535 39.877,38.224 39.407,38.852 38.852,39.407 38.224,39.877 37.535,40.253 36.8,40.527 36.033,40.694 35.25,40.75 -35.25,40.75 -36.033,40.694 -36.8,40.527 -37.535,40.253 -38.224,39.877 -38.852,39.407 -39.407,38.852 -39.877,38.224 -40.253,37.535 -40.527,36.8 -40.694,36.033 -40.75,35.25 -40.75,-35.25 -40.694,-36.033 -40.527,-36.8 -40.253,-37.535 -39.877,-38.224 -39.407,-38.852 -38.852,-39.407 -38.224,-39.877 -37.535,-40.253 -36.8,-40.527 -36.033,-40.694
GND on Bottom Layer "main bottom gnd pour" (solid, pour order 3): -35.25,-40.75 -10.18,-40.75 -10.002,-40.73 -9.833,-40.671 -9.681,-40.575 -9.555,-40.449 -9.459,-40.297 -9.4,-40.128 -9.38,-39.95 -9.38,-39.1 -9.36,-38.922 -9.301,-38.753 -9.205,-38.601 -9.079,-38.475 -8.927,-38.379 -8.758,-38.32 -8.58,-38.3 9.13,-38.3 9.308,-38.32 9.477,-38.379 9.629,-38.475 9.755,-38.601 9.851,-38.753 9.91,-38.922 9.93,-39.1 9.93,-39.95 9.95,-40.128 10.009,-40.297 10.105,-40.449 10.231,-40.575 10.383,-40.671 10.552,-40.73 10.73,-40.75 35.25,-40.75 36.033,-40.694 36.8,-40.527 37.535,-40.253 38.224,-39.877 38.852,-39.407 39.407,-38.852 39.877,-38.224 40.253,-37.535 40.527,-36.8 40.694,-36.033 40.75,-35.25 40.75,35.25 40.694,36.033 40.527,36.8 40.253,37.535 39.877,38.224 39.407,38.852 38.852,39.407 38.224,39.877 37.535,40.253 36.8,40.527 36.033,40.694 35.25,40.75 -35.25,40.75 -36.033,40.694 -36.8,40.527 -37.535,40.253 -38.224,39.877 -38.852,39.407 -39.407,38.852 -39.877,38.224 -40.253,37.535 -40.527,36.8 -40.694,36.033 -40.75,35.25 -40.75,-35.25 -40.694,-36.033 -40.527,-36.8 -40.253,-37.535 -39.877,-38.224 -39.407,-38.852 -38.852,-39.407 -38.224,-39.877 -37.535,-40.253 -36.8,-40.527 -36.033,-40.694

## Other copper
Top Layer:
  pour cut-out: -42.05,10.95 cw(c-38.982,10.956) -42.05,10.956 -42.05,23.306 -42.05,34.203 -42.05,35.063 cw(c-39.05,35.063) -42.042,35.276 cw(c-39.042,35.276) -42.035,35.49 -42.014,35.775 cw(c-39.022,35.561) -41.954,36.194 cw(c-38.964,35.977) -41.896,36.605 cw(c-38.95,35.974) -41.894,36.615 -41.87,36.722 cw(c-38.94,36.084) -41.75,37.132 cw(c-38.819,36.501) -41.628,37.549 -41.588,37.656 cw(c-38.781,36.609) -41.41,38.045 cw(c-38.602,36.997) -41.233,38.434 -41.179,38.532 cw(c-38.549,37.097) -40.948,38.892 cw(c-38.317,37.456) -40.716,39.252 -40.649,39.342 cw(c-38.251,37.547) -40.367,39.668 cw(c-37.969,37.873) -40.086,39.991 -40.007,40.07 cw(c-37.89,37.953) -39.684,40.35 cw(c-37.567,38.23) -39.362,40.629 -39.271,40.697 cw(c-37.477,38.301) -38.911,40.929 cw(c-37.118,38.533) -38.551,41.16 -38.453,41.214 cw(c-37.019,38.588) -38.063,41.392 cw(c-36.63,38.766) -37.674,41.569 -37.569,41.609 cw(c-36.523,38.806) -37.158,41.729 cw(c-36.112,38.927) -36.747,41.85 -36.637,41.874 cw(c-36.002,38.954) -36.214,41.935 cw(c-35.578,39.013) -35.79,41.996 -35.509,42.016 cw(c-35.297,39.069) -35.295,42.023 cw(c-35.084,39.074) -35.082,42.031 -21,42.031 cw(c-21,39.031) -18.941,41.214 18.942,41.214 cw(c21,39.031) 21.004,42.031 22.524,42.031 22.526,42.031 ccw(c22.524,41.923) 22.52,42.031 22.526,42.031 24.627,42.03 35.084,42.023 35.298,42.023 cw(c35.298,39.077) 35.512,42.016 35.791,41.996 cw(c35.578,39.016) 36.21,41.936 cw(c35.998,38.956) 36.634,41.875 36.748,41.85 cw(c36.113,38.93) 37.159,41.729 cw(c36.524,38.811) 37.569,41.609 37.675,41.569 cw(c36.632,38.772) 38.064,41.392 cw(c37.021,38.593) 38.453,41.214 38.552,41.16 cw(c37.121,38.539) 38.912,40.928 cw(c37.482,38.308) 39.272,40.697 39.362,40.63 cw(c37.574,38.24) 39.686,40.349 cw(c37.897,37.959) 40.009,40.069 40.089,39.989 cw(c37.979,37.878) 40.369,39.666 cw(c38.259,37.555) 40.649,39.343 40.717,39.253 cw(c38.329,37.464) 40.948,38.892 cw(c38.56,37.104) 41.18,38.532 41.234,38.434 cw(c38.614,37.002) 41.411,38.044 cw(c38.79,36.612) 41.589,37.655 41.629,37.549 cw(c38.831,36.505) 41.749,37.139 cw(c38.95,36.094) 41.87,36.728 41.894,36.618 cw(c38.976,35.983) 41.955,36.194 cw(c39.037,35.559) 42.015,35.771 42.026,35.62 cw(c41.816,35.603) 42.027,35.613 42.036,35.491 cw(c39.096,35.279) 42.043,35.277 cw(c39.101,35.065) 42.051,35.063 42.051,8.931 42.051,-34.094 cw(c39.05,-34.095) 36.05,-34.094 36.05,7.688 34.256,9.482 cw(c36.379,11.609) 34.036,9.726 32.331,11.432 cw(c34.45,13.556) 31.45,13.556 31.45,19.006 cw(c34.45,19.006) 32.331,21.129 33.894,22.692 cw(c36.373,21.007) 34.256,23.129 36.05,24.923 36.05,32.601 34.558,34.094 27.722,34.094 cw(c28.059,36.289) 26.269,34.975 25.133,36.033 22.526,36.03 cw(c22.525,36.067) 22.524,36.03 21,36.03 cw(c21,39.03) 18.879,36.909 cw(c21.001,39.031) 18.391,37.549 -18.39,37.549 cw(c-20.999,39.03) -21,36.03 -25.007,36.03 -26.161,34.876 cw(c-28.284,36.995) -28.285,33.995 -34.482,33.995 -36.049,32.428 -36.049,24.548 -32.13,20.629 cw(c-34.249,18.506) -31.249,18.506 -31.249,13.056 cw(c-34.249,13.055) -32.13,10.932 -36.049,7.013 -36.049,-34.094 cw(c-39.05,-34.094) -42.05,-34.094
  pour cut-out: 22.973,-29.652 28.411,-35.089 34.089,-29.411 28.652,-23.973
  pour cut-out: -34.177,27.373 -28.739,21.936 -23.061,27.614 -28.498,33.052
  pour cut-out: -26.516,-26.75 -37.175,-26.75 -37.15,-29.875 -26.491,-29.875
  pour cut-out: -35.5,-41.3 -35.5,-37.153 -34.947,-36.6 -30.4,-36.6 -29.9,-37.1 -29.9,-41.3
  text "rev 2.3" at 20.675,28.95 h0.8
Bottom Layer:
  pour cut-out: -35.5,-41.3 -35.5,-37.153 -34.947,-36.6 -30.4,-36.6 -29.9,-37.1 -29.9,-41.3
  pour cut-out: -18.9,46.2 -18.9,37.55 19.4,37.55 19.4,46.2

## Silkscreen, mask and mechanical layers (free items; w line width, h text height)
Top Overlay:
  rectangle: 21.6,8.9 39.6,13.9
  text "Designed by PLab in Slovenia" at -22.287,37.5 h1
  text "RST" at 2.1,35.2 h2 r315
  text "HomeButtons" at 11.259,29.941 h1.6 r315
  text "HW rev 2.3" at 13.4,24.3 h1 r315
  text "SN:" at 22.05,14.2 h1
  text "5V INPUT" at 8.425,-2.125 h2 r315
  text "+" at -2.425,-3.075 h3 r315
  text "BOOT LED" at 31.125,-15.25 h1.52
  text "BOOT" at -20.464,-23.05 h2 r315
  text "+" at 17.316,-25.484 h6 r45
  text "+" at 14.85,-34.075 h3 r315
Bottom Overlay:
  lines w0.2: -18.55,-34 -18.55,40 ; -18.4,-38.3 -10,-38.3 ; 10.5,-38.3 20,-38.3 ; 18.35,40 18.55,-40
Board Outline:
  lines w0.1: -40.75,-35.25 -40.694,-36.033 -40.527,-36.8 -40.253,-37.535 -39.877,-38.224 -39.407,-38.852 -38.852,-39.407 -38.224,-39.877 -37.535,-40.253 -36.8,-40.527 -36.033,-40.694 -35.25,-40.75 -10.18,-40.75 -10.002,-40.73 -9.833,-40.671 -9.681,-40.575 -9.555,-40.449 -9.459,-40.297 -9.4,-40.128 -9.38,-39.95 -9.38,-39.1 -9.36,-38.922 -9.301,-38.753 -9.205,-38.601 -9.079,-38.475 -8.927,-38.379 -8.758,-38.32 -8.58,-38.3 9.13,-38.3 9.308,-38.32 9.477,-38.379 9.629,-38.475 9.755,-38.601 9.851,-38.753 9.91,-38.922 9.93,-39.1 9.93,-39.95 9.95,-40.128 10.009,-40.297 10.105,-40.449 10.231,-40.575 10.383,-40.671 10.552,-40.73 10.73,-40.75 35.25,-40.75 36.033,-40.694 36.8,-40.527 37.535,-40.253 38.224,-39.877 38.852,-39.407 39.407,-38.852 39.877,-38.224 40.253,-37.535 40.527,-36.8 40.694,-36.033 40.75,-35.25 40.75,35.25 40.694,36.033 40.527,36.8 40.253,37.535 39.877,38.224 39.407,38.852 38.852,39.407 38.224,39.877 37.535,40.253 36.8,40.527 36.033,40.694 35.25,40.75 -35.25,40.75 -36.033,40.694 -36.8,40.527 -37.535,40.253 -38.224,39.877 -38.852,39.407 -39.407,38.852 -39.877,38.224 -40.253,37.535 -40.527,36.8 -40.694,36.033 -40.75,35.25 -40.75,-35.25 ; -35.582,-6.518 -32.4,-9.7 -21.086,1.614 -24.268,4.796 -35.582,-6.518

## Text inside footprints (layer, text, board x,y; h text height)
J3: Top Overlay "nRST" at -3.365,23.117 h1.3 r315; Top Overlay "TCK" at 7.561,24.283 h1.3 r315; Top Overlay "3V3" at 0.703,31.105 h1.3 r315; Top Overlay "USB" at -2.114,23.987 h1.3 r315; Top Overlay "GND" at 5.001,26.807 h1.3 r315; Top Overlay "TDO" at 0.611,20.662 h1.3 r315; Top Overlay "5V" at -1.367,33.156 h1.3 r315; Top Overlay "TDI" at 2.623,18.682 h1.3 r315; Top Overlay "RX" at -4.881,26.151 h1.3 r315; Top Overlay "TMS" at 2.818,28.991 h1.3 r315; Top Overlay "TX" at -6.701,27.971 h1.3 r315; Top Overlay "CMSIS-DAP" at -2.672,34.546 h1.3 r225